# Altium PCB PCB1.PcbDoc
Units mm, origin at the board's own origin, x right, y up, seen from the top; angles counter-clockwise.
Board outline 88 x 60 mm, 2 copper layers (Top Layer, Bottom Layer); 47 components, 61 nets, 222 pads, 0 vias.
Unrouted connection lines stored in the file: 150.
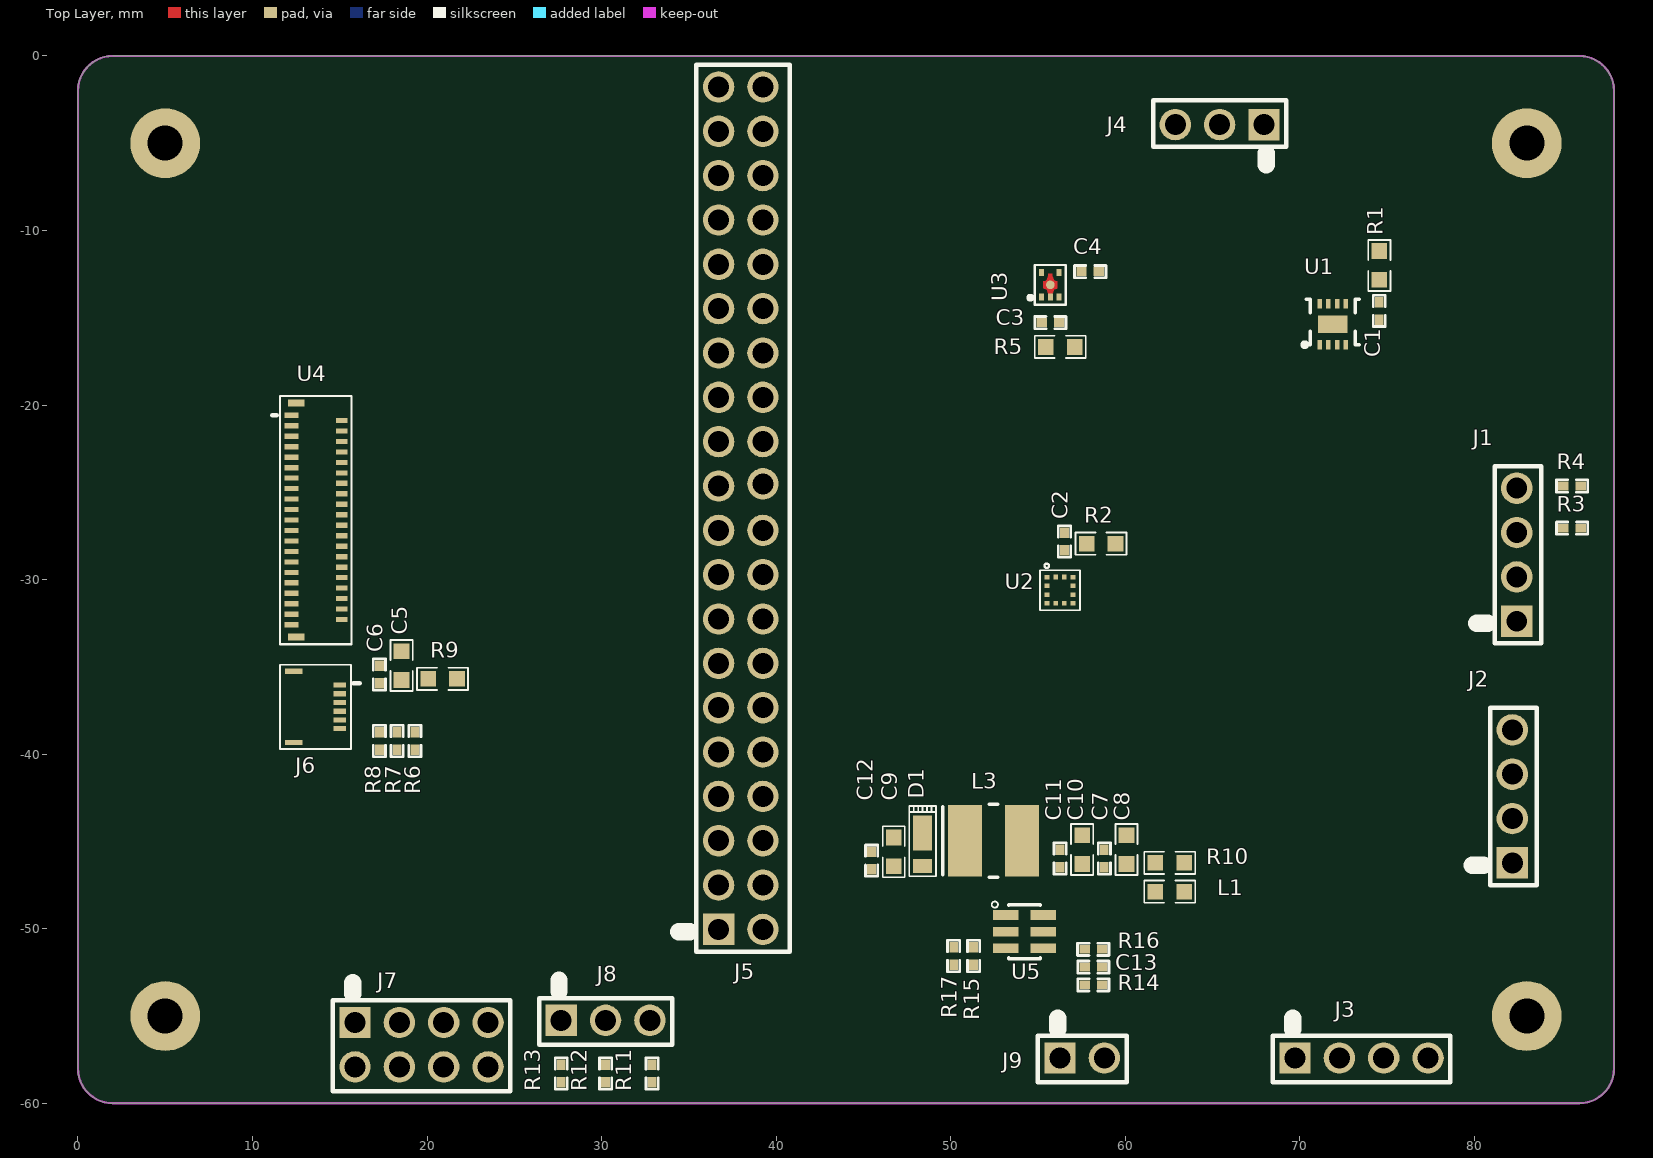
[diagram p0: Top Layer view]
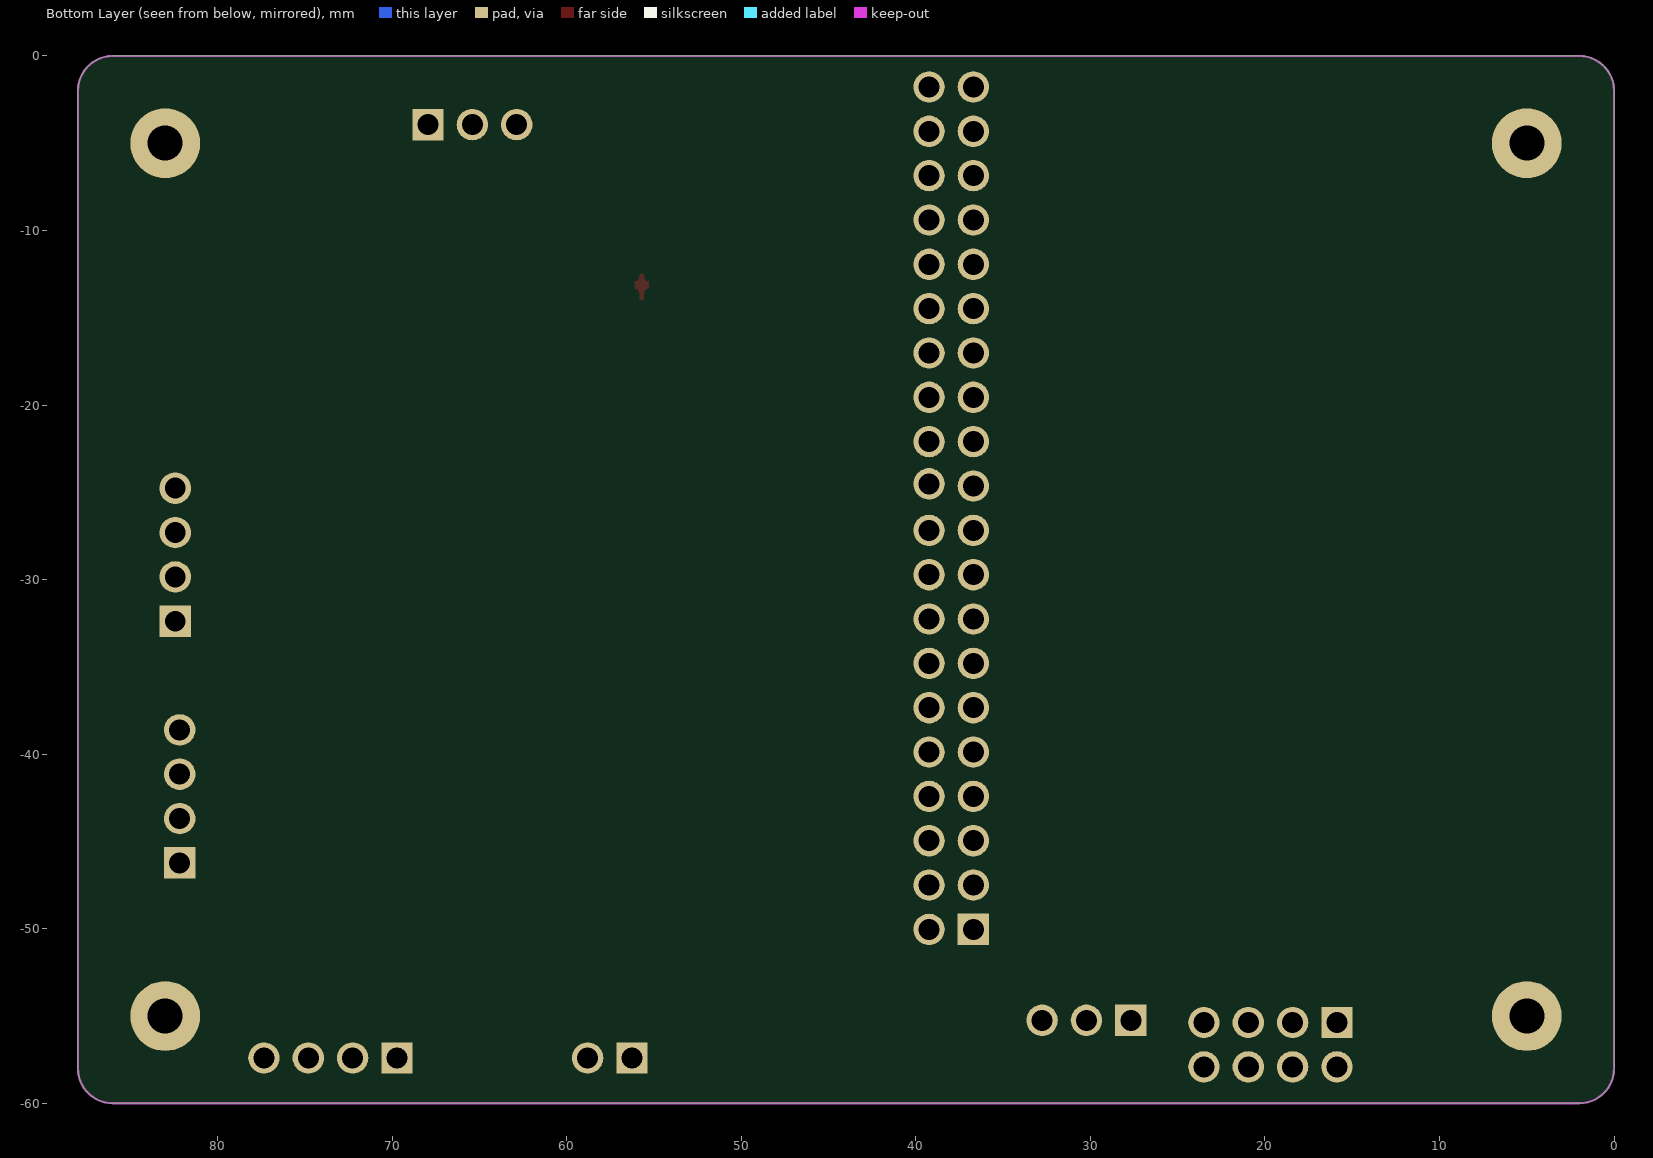
[diagram p1: Bottom Layer view, seen from below]

## Layer stack, top to bottom
Top Layer: signal copper 0.0356
Dielectric: dielectric 0.32, FR-4, Dk 4.8
Bottom Layer: signal copper 0.0356

## Board outline
2,-60 cw(c2,-58) 0,-58 0,-2 cw(c2,-2) 2,0 86,0 cw(c86,-2) 88,-2 88,-58 cw(c86,-58) 86,-60

## Design rules (kind name [scope] priority, off if disabled: settings)
Clearance [All] p1: gap=0.254
PolygonConnect [All] p1: connectstyle=Relief reliefconductorwidth=0.254 reliefentries=4 polygonreliefangle="90 Angle"
RoutingVias [All] p1: holewidth=0.711 width=1.27 viastyle="Through Hole" minholewidth=0.711 minwidth=1.27 maxholewidth=0.711 maxwidth=1.27
SilkscreenOverComponentPads [All] p1: minsilkscreentomaskgap=0.254
SolderMaskExpansion [All] p1: expansion=0.102
Width [All] p1: maxlimit=0.254 minlimit=0.254 preferedwidth=0.254
27 further rules are at their usual default settings.

## Classes and differential pairs
component class LCD_RGB: C5 C6 C7 C8 C9 C10 C11 C12 C13 D1 J5 J6 J7 J8 J9 L1 L3 R6 R7 R8 R9 R10 R11 R12 R13 R14 R15 R16 R17 U4 U5
component class Sensor: C1 C2 C3 C4 J1 J2 J3 J4 R1 R2 R3 R4 R5 U1 U2 U3

## Components (designator, comment, footprint, x,y, rotation, side; value= is the part's Value field where it differs from the comment)
C1 "0.1uF/10V" 0402C 74.549,-14.605 r270 top
C2 "4.7uF/10V" 0402C 56.515,-27.813 r90 top
C3 "0.1uF/10V" 0402C 55.705,-15.275 r0 top
C4 "0.1uF/10V" 0402C 57.991,-12.354 r0 top
C5 "10uF" 0603C 18.542,-34.925 r270 top
C6 "0.1uF/10V" 0402C 17.272,-35.433 r270 top
C7 "0.1uF/10V" 0402C 58.801,-45.974 r90 top
C8 "10uF/10V" 0603C 60.071,-45.466 r90 top
C9 "10uF/50V" 0603C 46.736,-45.593 r90 top
C10 "10uF/10V" 0603C 57.531,-45.466 r270 top
C11 "1nF/10V" 0402C 56.261,-45.974 r270 top
C12 "0.1uF/10V" 0402C 45.466,-46.101 r270 top
C13 "1uF/10V" 0402C 58.166,-52.197 r180 top
D1 "RTR040N03TL" TUMD2M 48.387,-45.466 r0 top
J1 "Jumper" 2.54*4 82.423,-28.575 r90 top
J2 "CON_VCC" 2.54*4 82.169,-42.418 r90 top
J3 "CON_VCC" 2.54*4 73.533,-57.404 r0 top
J4 "CON_UART" 2.54*3 65.405,-3.937 r180 top
J5 "LCD" 2.54*40 37.973,-25.908 r90 top
J6 "FH19C-6S-05SH" FPC_CON6-BACK-MOLEX 13.678,-37.286 r0 top locked
J7 "TP" 2.54*8 15.875,-55.372 r0 top
J8 "LCD/SPI" 2.54*3 30.226,-55.245 r0 top
J9 "CON_LCD" 2.54*2 57.531,-57.404 r0 top
L1 "BLM18AG601SN1" 0603R 63.373,-47.879 r180 top
L3 "10uH-DCR<0.1R-1.5A/ELL4LG2R2NA" INDM4040X18N 52.451,-44.958 r180 top
R1 "0R/1%" 0603R 74.549,-11.176 r270 top
R2 "0R/1%" 0603R 59.436,-27.94 r180 top
R3 "4.7K/1%" 0402R 85.598,-27.051 r180 top
R4 "4.7K/1%" 0402R 85.598,-24.638 r0 top
R5 "0R/1%" 0603R 55.451,-16.672 r0 top
R6 "4.7K/5%" 0402R 19.304,-39.243 r270 top
R7 "4.7K/5%" 0402R 18.288,-39.243 r270 top
R8 "4.7K/1%" 0402R 17.272,-39.243 r90 top
R9 "0R/1%" 0603R 20.066,-35.687 r0 top
R10 "0R/1%" 0603R 61.722,-46.228 r0 top
R11 "10K/1%" 0402R 32.893,-58.293 r90 top
R12 "10K/1%" 0402R 30.226,-58.293 r90 top
R13 "10K/1%" 0402R 27.686,-58.293 r90 top
R14 "47K/1%" 0402R 58.166,-53.213 r180 top
R15 "2K2/1%" 0402R 51.308,-51.562 r270 top
R16 "100K/1%" 0402R 58.166,-51.181 r0 top
R17 "2R2/1%" 0402R 50.165,-51.562 r90 top
U1 "SHT31" DFN 71.882,-15.367 r0 top
U2 "DS_DA226" LGA-12 56.261,-30.607 r0 top
U3 "BH1721FVC-TR" WSOF5 55.705,-13.116 r90 top
U4 "LCD_RGB Interface" FPC_CON41-0.3MM-HRS 13.678,-26.586 r270 top locked
U5 "AP3032" SOT23-6-L 54.229,-50.165 r0 top

## Footprints (in the part's own frame and the unit in brackets; to place one, negate y for a bottom-side part, rotate by r counter-clockwise, add the part's x,y. Pads: shape width x height; smd on the part's side, far side on the other; paste and mask are expansions set on the pad)
2.54*2 [mm]
  rect 1.8x1.8 hole 1.2: 1(-1.27,0)
  round 1.8 hole 1.2: 2(1.27,0)
  silkscreen extent -2.54,-1.4 2.54,2.29
2.54*3 [mm]
  rect 1.8x1.8 hole 1.2: 1(-2.54,0)
  round 1.8 hole 1.2: 2(0,0) 3(2.54,0)
  silkscreen extent -3.81,-1.4 3.81,2.29
2.54*4 [mm]
  rect 1.8x1.8 hole 1.2: 1(-3.81,0)
  round 1.8 hole 1.2: 2(-1.27,0) 3(1.27,0) 4(3.81,0)
  silkscreen extent -5.08,-1.4 5.08,2.29
2.54*8 [mm]
  rect 1.8x1.8 hole 1.2: 1(0,0)
  round 1.8 hole 1.2: 2(2.54,0) 3(5.08,0) 4(7.62,0) 5(7.62,-2.54) 6(5.08,-2.54) 7(2.54,-2.54) 8(0,-2.54)
  silkscreen extent -1.27,-3.94 8.89,2.29
2.54*40 [mm]
  rect 1.8x1.8 hole 1.2: 1(-24.13,1.27)
  round 1.8 hole 1.2: 2(-21.59,1.27) 3(-19.05,1.27) 4(-16.51,1.27) 5(-13.97,1.27) 6(-11.43,1.27) 7(-8.89,1.27) 8(-6.35,1.27) 9(-3.81,1.27) 10(-1.27,1.27) 11(1.27,1.27) 12(3.81,1.27) 13(6.35,1.27) 14(8.89,1.27) 15(11.43,1.27) 16(13.97,1.27) 17(16.51,1.27) 18(19.05,1.27) 19(21.59,1.27) 20(24.13,1.27) 21(24.13,-1.27) 22(21.59,-1.27) 23(19.05,-1.27) 24(16.51,-1.27) 25(13.97,-1.27) 26(11.43,-1.27) 27(8.89,-1.27) 28(6.35,-1.27) 29(3.81,-1.27) 30(1.397,-1.27) 31(-1.27,-1.27) 32(-3.81,-1.27) 33(-6.35,-1.27) 34(-8.89,-1.27) 35(-11.43,-1.27) 36(-13.97,-1.27) 37(-16.51,-1.27) 38(-19.05,-1.27) 39(-21.59,-1.27) 40(-24.13,-1.27)
  silkscreen extent -25.4,-2.79 25.4,3.56
0402C [mm]
  rect 0.6x0.5 smd: 1(-0.5,0) 2(0.5,0)
  silkscreen extent -0.9,-0.35 0.9,0.35, body extent -0.51,-0.25 0.51,0.25, height 0.5
0402R [mm]
  rect 0.6x0.5 smd: 1(-0.5,0) 2(0.5,0)
  silkscreen extent -0.9,-0.35 0.9,0.35, body extent -0.51,-0.25 0.51,0.25, height 0.5
0603C [mm]
  rect 0.9x0.9 smd: 1(-0.826,0) 2(0.826,0)
  silkscreen extent -1.46,-0.64 1.46,0.64, body extent -1.38,-0.55 1.38,0.55, height 0.9
0603R [mm]
  rect 0.9x0.9 smd: 1(0,0) 2(1.651,0)
  silkscreen extent -0.64,-0.64 2.29,0.64, body extent -0.55,-0.55 2.2,0.55, height 0.5
DFN [mm]
  rect 0.25x0.55 smd: 1(-0.75,-1.175) 2(-0.25,-1.175) 3(0.25,-1.175) 4(0.75,-1.175) 5(0.75,1.175) 6(0.25,1.175) 7(-0.25,1.175) 8(-0.75,1.175)
  rect 1.7x1 smd: 9(0,0)
  silkscreen extent -1.72,-1.3 1.53,1.43, body extent -1.48,-1.55 1.51,1.55, height 1
FPC_CON6-BACK-MOLEX [mm] "厂家：Molex，型号：5"
  rect 0.7x0.3 smd: 1(1.325,1.25) 2(1.325,0.75) 3(1.325,0.25) 4(1.325,-0.25) 5(1.325,-0.75) 6(1.325,-1.25)
  rect 1x0.3 smd: 7(-1.325,2.04) 8(-1.325,-2.04)
  silkscreen extent -2.1,-2.41 2.47,2.41, body extent -1.93,-2.29 1.78,2.29, height 1
FPC_CON41-0.3MM-HRS [mm] "厂家：HRS，型号：FH26W-41"
  rect 0.3x0.8 smd: 1(-6,-1.438) 3(-5.4,-1.438) 5(-4.8,-1.438) 7(-4.2,-1.438) 9(-3.6,-1.438) 11(-3,-1.438) 13(-2.4,-1.438) 15(-1.8,-1.438) 17(-1.2,-1.438) 19(-0.6,-1.438) 21(0,-1.438) 23(0.6,-1.438) 25(1.2,-1.438) 27(1.8,-1.438) 29(2.4,-1.438) 31(3,-1.438) 33(3.6,-1.438) 35(4.2,-1.438) 37(4.8,-1.438) 39(5.4,-1.438) 41(6,-1.438)
  rect 0.3x0.65 smd: 2(-5.7,1.438) 4(-5.1,1.438) 6(-4.5,1.438) 8(-3.9,1.438) 10(-3.3,1.438) 12(-2.7,1.438) 14(-2.1,1.438) 16(-1.5,1.438) 18(-0.9,1.438) 20(-0.3,1.438) 22(0.3,1.438) 24(0.9,1.438) 26(1.5,1.438) 28(2.1,1.438) 30(2.7,1.438) 32(3.3,1.438) 34(3.9,1.438) 36(4.5,1.438) 38(5.1,1.438) 40(5.7,1.438)
  rect 0.4x0.95 smd: 42(-6.7,-1.162) 43(6.7,-1.162)
  silkscreen extent -7.11,-2.54 7.11,2
INDM4040X18N [mm] "Molded Inductor, 2-Leads, Body 4.0x4.0mm, IPC Medium Density"
  rect 1.95x4.1 smd: 1(-1.625,0) 2(1.625,0)
  silkscreen extent -0.25,-2.1 2.9,2.1, body extent -2.1,-2.1 2.1,2.1, height 1.8
LGA-12 [mm]
  rect 0.275x0.25 smd: 1(-0.75,0.75) 2(-0.75,0.25) 3(-0.75,-0.25) 4(-0.75,-0.75) 7(0.75,-0.75) 8(0.75,-0.25) 9(0.75,0.25) 10(0.75,0.75)
  rect 0.25x0.275 smd: 5(-0.25,-0.75) 6(0.25,-0.75) 11(0.25,0.75) 12(-0.25,0.75)
  silkscreen extent -1.14,-1.14 1.14,1.52
SOT23-6-L [mm]
  rect 1.45x0.55 smd: 1(-1.075,0.95) 2(-1.075,0) 3(-1.075,-0.95) 4(1.075,-0.95) 5(1.075,0) 6(1.075,0.95)
  silkscreen extent -1.88,-1.55 0.9,1.73, body extent -1.23,-1.4 1.19,1.4, height 1.08
TUMD2M [mm] "厂家：ROHM，型号£"
  rect 1.1x2 smd: 1(0,0.95)
  rect 1.1x0.8 smd: 2(0,-0.95)
  silkscreen extent -0.76,-1.52 0.76,2.49
WSOF5 [mm]
  rect 0.4x0.28 smd: 1(-0.7,0.5) 2(-0.7,0) 3(-0.7,-0.5) 4(0.7,-0.5) 5(0.7,0.5)
  round 0.5 smd: 2(0,0)
  Top Layer region: -0.455,0.15 -0.33,0.183 -0.238,0.275 -0.205,0.4 -0.205,0.4 0.205,0.4 0.205,0.4 0.238,0.275 0.33,0.183 0.455,0.15 0.455,0.15 0.455,0.11 0.65,0.11 0.65,-0.11 0.455,-0.11 0.455,-0.15 0.33,-0.183 0.238,-0.275 0.205,-0.4 0.205,-0.4 -0.205,-0.4 -0.238,-0.275 -0.33,-0.183 -0.455,-0.15 -0.455,-0.15 -0.455,-0.11 -0.85,-0.11 -0.85,0.11 -0.455,0.11
  silkscreen extent -1.14,-0.89 1.14,1.25, body extent -1,-0.74 1,0.74, height 0.6

## Part data
C1 C2: library part CAP, "厂家：Murata，型号：GRM155R71A10"
C3 C4 C9 C12: library part CAP, "厂家：Murata，"
C5: library part CAP, "厂家：Murata，型号：GRM1555C1H12"
C6 C10 C11 C13: library part CAP, "Capacitor"
C7: library part Cap, "Capacitor"
C8: library part "Cap Pol1", "Polarized Capacitor (Radial)"
D1: library part "D Schottky", "Schottky Diode"
J1: library part Jumper*4
J5: library part FPC60_1
J6: "ZIF connector placed bottom side"
J7: library part Jumper_uart, "Jumper"
J8: library part Jumper, "Jumper"
L1: library part CHOKE, "厂家：MURATA，型号：BLM18AG"
L3: library part Inductor, "Inductor"
R1 R2 R3 R4 R5: library part RES1, "厂家：Yageo，型号：RC0402FR-"
R6 R7 R8 R11 R12 R13: library part Res1, "厂家：Yageo，"
R9 R10: library part RES1, "厂家：Yageo，型号：RC0402FR"
R14 R15 R16 R17: library part Res1, "Resistor"
U1: "厂家：盛思睿，型"
U2: library part LI, "厂家：ST，型号：LI"

## Free pads (board coordinates)
  round 4 hole 2: 0(5,-55) 0(5,-5) 0(83,-55) 0(83,-5)

## Nets (pads, with @x,y where several pads share a name; then routed paths per layer and width w, separated by ;. In a path a pad name is that pad's centre, name@x,y a point inside that pad or via, vN(x,y) a via of type N, cw(c..) or ccw(c..) an arc to the next point about the centre after c; other vN are vias at no path point)
+3.3V: J3.1 J3.2 L1.1 R1.1 R2.1 R3.2 R4.2 R5.2 R9.2 R10.2 R11.1 R12.1 R13.1
ALERT: J4.1 U1.3
B_5V: J2.1 J2.2
BLVDD: C7.1 C8.1 C10.2 C11.2 L1.2 L3.1 R10.1 U5.6
G-INT1: J1.1 U2.5
G-INT2: J1.2 U2.6
G-VDD: C2.1 R2.2 U2.3 U2.7 U2.11
GND: C1.2 C2.2 C3.2 C4.2 C5.1 C6.1 C7.2 C8.2 C9.2 C10.1 C11.1 C12.1 C13.1 J2.3 J2.4 J3.3 J3.4 J5.3 J5.29 J5.36 J6.6 J9.2 pad.0 R16.2 R17.2 U1.2 U1.7 U1.8 U1.9 U2.1 U2.8 U2.9 U3.2 U4.5 U4.14 U4.16 U4.21 U4.30 U4.39 U5.2
LCD_B0: J5.21 U4.6
LCD_B1: J5.22 U4.7
LCD_B2: J5.23 U4.8
LCD_B3: J5.24 U4.9
LCD_B4: J5.25 U4.10
LCD_B5: J5.26 U4.11
LCD_B6: J5.27 U4.12
LCD_B7: J5.28 U4.13
LCD_BL_EN: J9.1 R14.1
LCD_DE: J5.34 U4.2
LCD_G0: J5.13 U4.22
LCD_G1: J5.14 U4.23
LCD_G2: J5.15 U4.24
LCD_G3: J5.16 U4.25
LCD_G4: J5.17 U4.26
LCD_G5: J5.18 U4.27
LCD_G6: J5.19 U4.28
LCD_G7: J5.20 U4.29
LCD_HS: J5.32 U4.4
LCD_PCLK: J5.30 U4.15
LCD_R0: J5.5 U4.31
LCD_R1: J5.6 U4.32
LCD_R2: J5.7 U4.33
LCD_R3: J5.8 U4.34
LCD_R4: J5.9 U4.35
LCD_R5: J5.10 U4.36
LCD_R6: J5.11 U4.37
LCD_R7: J5.12 U4.38
LCD_RESET: J5.31 U4.19
LCD_SPI1_CLK: J8.2 R12.2 U4.40
LCD_SPI1_CS: J8.1 R13.2 U4.41
LCD_SPI1_MOSI: J8.3 R11.2 U4.20
LCD_VCC: J5.4
LCD_VS: J5.33 U4.3
LED+: C9.1 C12.2 D1.2 J5.2 U4.18 U5.5
LED-: J5.1 R15.2 R17.1 U4.17
NetC1_1: C1.1 R1.2 U1.5
NetC13_2: C13.2 R14.2 R16.1 U5.4
NetD1_1: D1.1 L3.2 U5.1
NetR15_1: R15.1 U5.3
NRESET: J4.2 U1.6
OL_RESET: C4.1 J4.3 U3.4
OL_VCC: C3.1 R5.1 U3.1
RX: J7.2
T_SCL: J1.3 R3.1 U1.4 U2.12 U3.5
T_SDA: J1.4 R4.1 U1.1 U2.2 U3.3
TP_I2C_SCK: J6.3 J7.4 J7.5 R6.1
TP_I2C_SDA: J6.4 J7.3 J7.6 R7.1
TP_INT: J6.2 J7.8 R8.2
TP_RESET: J6.5 J7.7
TP_VCC: C5.2 C6.2 J6.1 R6.2 R7.2 R8.1 R9.1
TX: J7.1
VCC: U4.1
pads on no net: J5.35 J5.37 J5.38 J5.39 J5.40 J6.7 J6.8 U2.4 U2.10 U4.42 U4.43

## Keep-outs
Keep-Out Layer:
  the board outline again, w0.127